# EAGLE board fjöl (EAGLE 9.5.2)
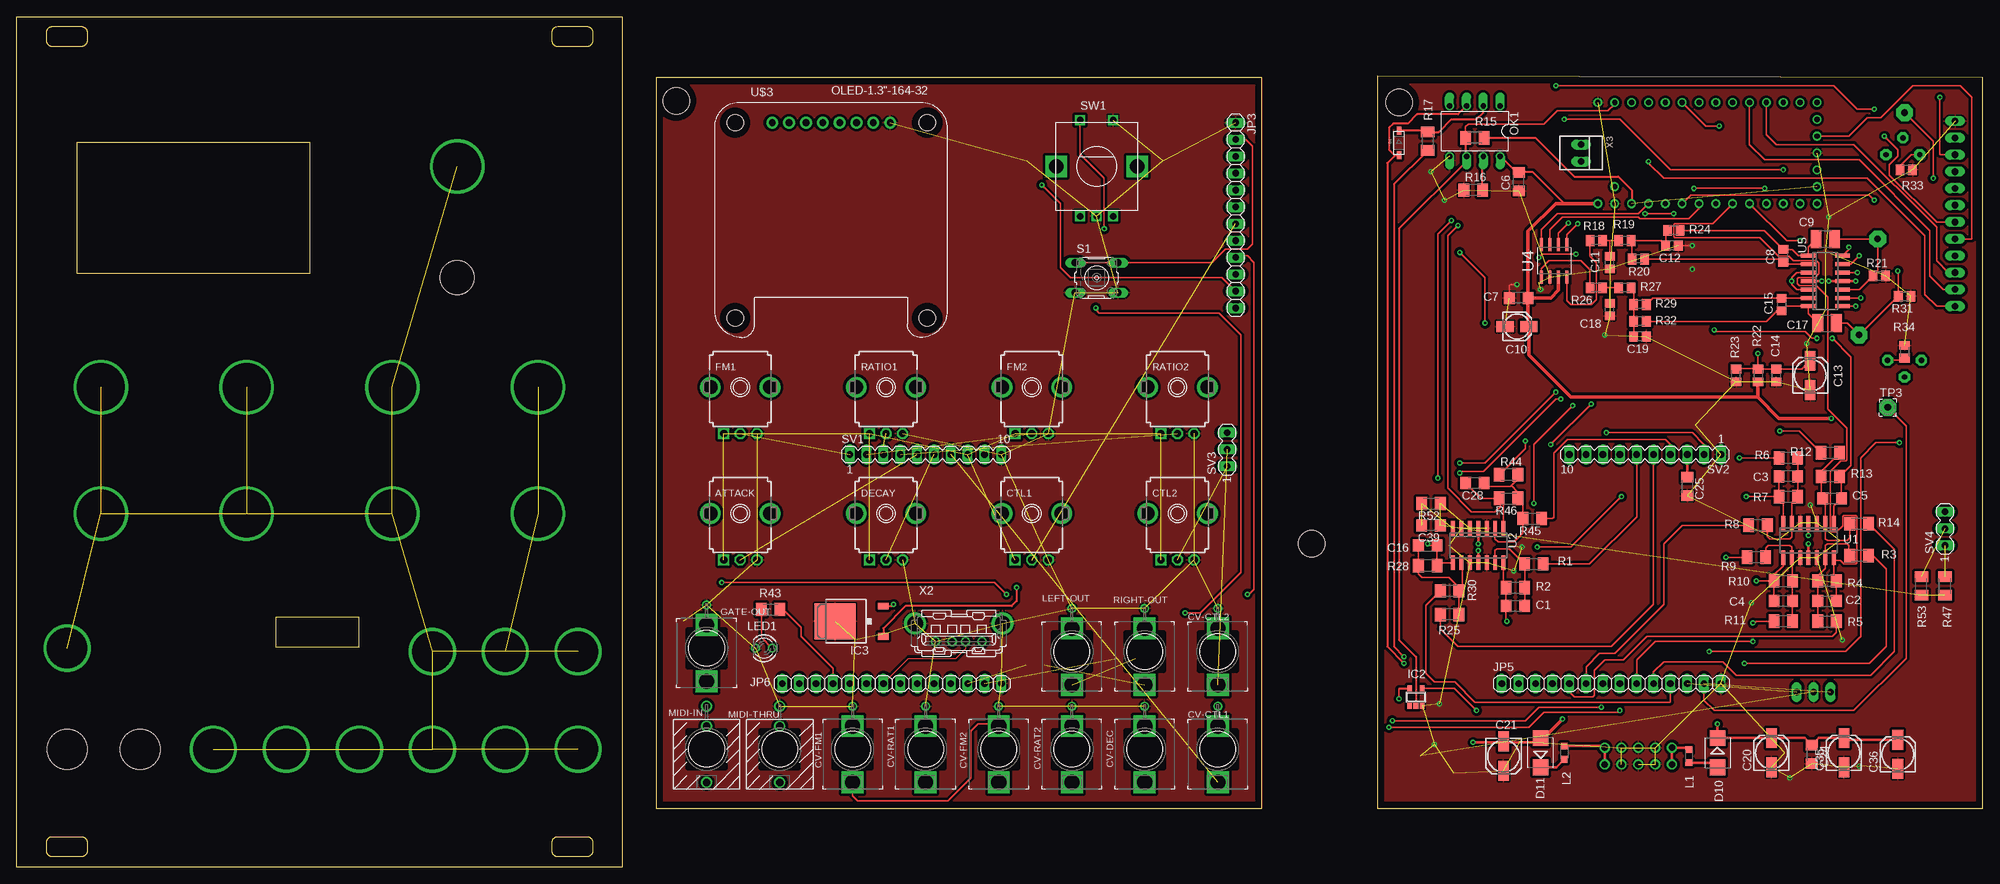
[diagram p0: board, top side]
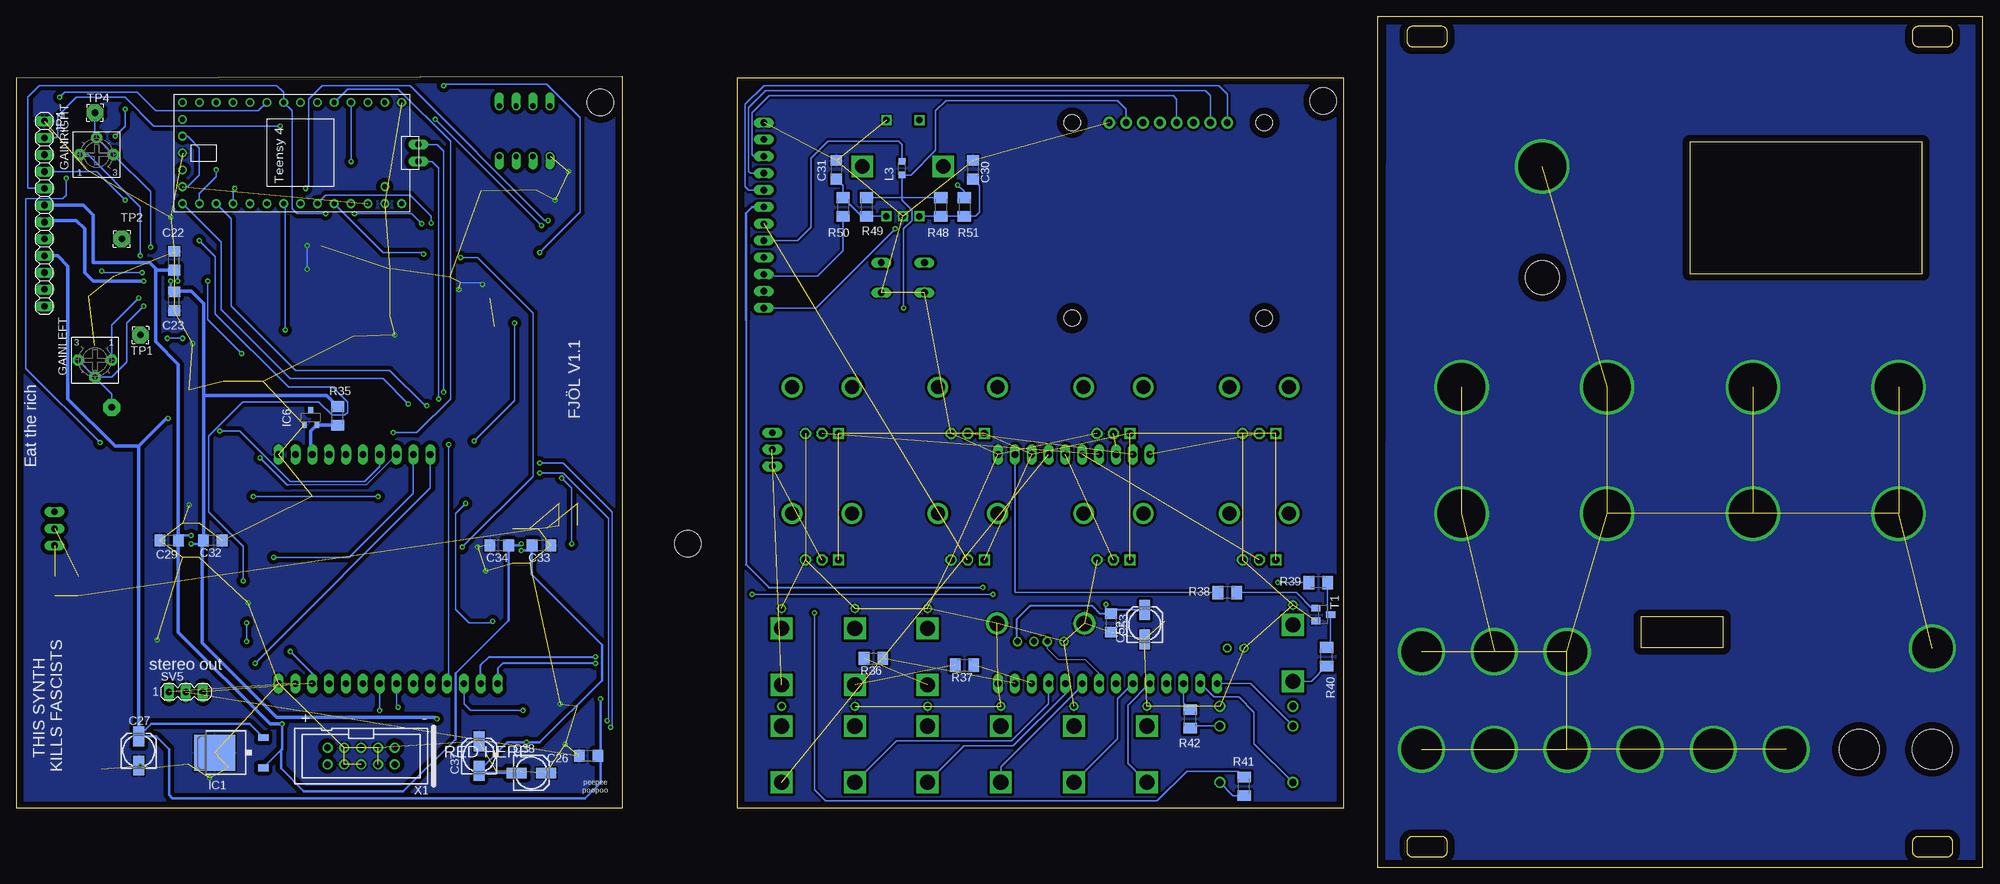
[diagram p1: board, bottom side, seen from below]

Size 296.42 x 128.27 mm. Coordinates in mm from the lower left corner, seen from the top.
Outline: 21.08,109.35 44.2,109.35 44.2,89.53 9.14,89.53 9.14,109.35 21.34,109.35
Outline: 96.39,8.89 187.71,8.89 187.71,119.05 96.39,119.05 96.39,8.89
Outline: 205.11,8.89 296.42,8.89 296.42,119.05 205.11,119.3 205.11,8.89
Outline: 91.31,0 0,0 0,128.27 91.31,128.27 91.31,0
Outline: 10.63,125.92 10.63,124.61 arc-90 9.76,123.74 5.4,123.74 arc-90 4.53,124.61 4.53,125.92 arc-90 5.4,126.79 9.76,126.79 arc-90 10.63,125.92
Outline: 86.83,125.92 86.83,124.61 arc-90 85.96,123.74 81.6,123.74 arc-90 80.73,124.61 80.73,125.92 arc-90 81.6,126.79 85.96,126.79 arc-90 86.83,125.92
Outline: 10.63,3.75 10.63,2.44 arc-90 9.76,1.57 5.4,1.57 arc-90 4.53,2.44 4.53,3.75 arc-90 5.4,4.62 9.76,4.62 arc-90 10.63,3.75
Outline: 86.83,3.75 86.83,2.44 arc-90 85.96,1.57 81.6,1.57 arc-90 80.73,2.44 80.73,3.75 arc-90 81.6,4.62 85.96,4.62 arc-90 86.83,3.75
Outline: 39.12,37.72 51.56,37.72 51.56,33.15 39.12,33.15 39.12,37.72
Copper layers (1*16): Top 0.035mm / dielectric 1.5mm / Bottom 0.035mm
Design rules "default": minimum track width 6mil, minimum drill 0.35mm, track to track 6mil, track to pad 6mil, pad to pad 6mil, via to via 6mil, smd to smd 6mil, copper to edge 40mil, drill to drill 6mil, minimum pad ring 10mil, minimum via ring 8mil, stop-mask expansion 4mil, vias tented up to drill 0mil, thermal gap 10mil
Holes 4.01 mm at 99.44,115.57 208.41,115.32 195.2,48.77
Holes 6.1 mm at 18.64,17.78 7.62,17.78
Holes 5.2 mm at 66.42,88.9

## Footprints (pad centres in the part's own frame; a part is rotated, then mirrored left to right if it is on the bottom)
9MM_SNAP-IN_POT = drill 1.1 square: 1 -2.5,-7 | drill 1.1 octagon: 2 0,-7; 3 2.5,-7 | drill 2.1 pad 2.794: CHASSIS1 -4.5,0; CHASSIS2 4.5,0
C1206 = smd 1.6 x 1.8: 1 -1.4,0; 2 1.4,0
C0805 = smd 1.3 x 1.5: 1 -0.95,0; 2 0.95,0
C1210 = smd 1.6 x 2.7: 1 -1.4,0; 2 1.4,0
153CLV-0405 = smd 2.6 x 1.6: + 1.8,0; - -1.8,0
153CLV-0505 = smd 3 x 1.6: + 2.2,0; - -2.2,0
WQP-PJ301M-12_JACK = drill 2.286 pad 2.413 square: P$1_TIP 0,5; P$2_SWITCH 0,-3.5 | drill 0.85: P$3_SLEEVE 0,-6.5
SOD-123 = smd 1.2 x 0.7: A 1.85,0; C -1.85,0
SMB = smd 2.4 x 2.4: A 2.2,0; C -2.2,0
BOURNS_3362P_TRIMMER = drill 0.813 pad 1.676 octagon: 1 -2.54,0; 2 0,2.54; 3 2.54,0
TO252 = smd 1 x 1.6: 1 -2.28,-4.8; 2 2.28,-4.8 | smd 5.4 x 6.2: 3 0,2.5
SOT23-5 = smd 0.69 x 0.99: 1 -0.95,-1.29; 2 0,-1.29; 3 0.95,-1.29; 4 0.95,1.3; 5 -0.95,1.3
DBZ_R-PDSO-G3 = smd 0.7 x 1: 1 -0.95,-1.1; 2 0.95,-1.1; 3 0,1.1
1X12 = drill 1.016 long: 1 -13.97,0; 2 -11.43,0; 3 -8.89,0; 4 -6.35,0; 5 -3.81,0; 6 -1.27,0; 7 1.27,0; 8 3.81,0; 9 6.35,0; 10 8.89,0; 11 11.43,0; 12 13.97,0
1X14 = drill 1.016 long: 1 -16.51,0; 2 -13.97,0; 3 -11.43,0; 4 -8.89,0; 5 -6.35,0; 6 -3.81,0; 7 -1.27,0; 8 1.27,0; 9 3.81,0; 10 6.35,0; 11 8.89,0; 12 11.43,0; 13 13.97,0; 14 16.51,0
L2012C = smd 1 x 1: 1 -1,0; 2 1,0
LED3MM = drill 0.813 octagon: A -1.27,0; K 1.27,0
WQP-PJ366ST_JACK = drill 1.1: P$1_TIP 0,5; P$2_SWITCH 0,-3.5; P$3_SLEEVE 0,-6.5
DIL08 = drill 0.813 offset: 1 -3.81,-3.81; 2 -1.27,-3.81; 3 1.27,-3.81; 4 3.81,-3.81; 5 3.81,3.81; 6 1.27,3.81; 7 -1.27,3.81; 8 -3.81,3.81
M1206 = smd 1.6 x 2: 1 -1.4,0; 2 1.4,0
M0805 = smd 1.3 x 1.6: 1 -0.95,0; 2 0.95,0
B3F-10XX = drill 1.016 long: 1 -3.251,2.261; 2 3.251,2.261; 3 -3.251,-2.261; 4 3.251,-2.261
MA10-1 = drill 1.016 long: 1 -11.43,0; 2 -8.89,0; 3 -6.35,0; 4 -3.81,0; 5 -1.27,0; 6 1.27,0; 7 3.81,0; 8 6.35,0; 9 8.89,0; 10 11.43,0
MA03-1 = drill 1.016 long: 1 -2.54,0; 2 0,0; 3 2.54,0
ALPS_EC12E_SW = drill 1 square: A -2.5,-7.5; B 2.5,-7.5; C 0,-7.5; D -2.5,7; E 2.5,7 | drill 2.2 square: GND1 -6.1,0; GND2 6.1,0
SOT23 = smd 1 x 1.4: 1 -0.95,-1.1; 2 0.95,-1.1; 3 0,1.1
2,54/1,0 = drill 1.016 pad 2.54 octagon: 1 0,0
SO14 = smd 0.6 x 2.2: 1 -3.81,-2.6; 2 -2.54,-2.6; 3 -1.27,-2.6; 4 0,-2.6; 5 1.27,-2.6; 6 2.54,-2.6; 7 3.81,-2.6; 8 3.81,2.6; 9 2.54,2.6; 10 1.27,2.6; 11 0,2.6; 12 -1.27,2.6; 13 -2.54,2.6; 14 -3.81,2.6
SOIC127P600X175-8N = smd 1.97 x 0.6: 1 -2.475,1.905; 2 -2.475,0.635; 3 -2.475,-0.635; 4 -2.475,-1.905; 5 2.475,-1.905; 6 2.475,-0.635; 7 2.475,0.635; 8 2.475,1.905
TEENSY4.0 = drill 0.8: 3.3V@1 7.62,10.16; 3.3V@2 -2.54,-17.78; AGND 7.62,12.7; D0 -7.62,12.7; D1 -7.62,10.16; D2 -7.62,7.62; D3 -7.62,5.08; D4 -7.62,2.54; D5 -7.62,0; D6 -7.62,-2.54; D7 -7.62,-5.08; D8 -7.62,-7.62; D9 -7.62,-10.16; D10 -7.62,-12.7; D11 -7.62,-15.24; D12 -7.62,-17.78; D13/LED 7.62,-17.78; D14/A0 7.62,-15.24; D15/A1 7.62,-12.7; D16/A2 7.62,-10.16; D17/A3 7.62,-7.62; D18/A4 7.62,-5.08; D19/A5 7.62,-2.54; D20/A6 7.62,0; D21/A7 7.62,2.54; D22/A8 7.62,5.08; D23/A9 7.62,7.62; GND@1 -7.62,15.24; GND@2 0,-17.78; ON/OFF 5.08,-17.78; PROGRAM 2.54,-17.78; VBAT -5.08,-17.78; VIN 7.62,15.24; VUSB 5.08,12.7
OLED-1.3"-164-32 = drill 1.016 pad 1.778: 3.3V 21.336,32.512; CLK 11.176,32.512; CS 18.796,32.512; D/C 13.716,32.512; DATA 8.636,32.512; GND 26.416,32.512; RST 16.256,32.512; VIN 23.876,32.512 | hole 2.5: 3.048,3.048; 32.004,3.048; 3.048,32.512; 32.004,32.512
PAK100/2500-10 = drill 1 pad 1.422: 1 -5.08,-1.27; 2 -5.08,1.27; 3 -2.54,-1.27; 4 -2.54,1.27; 5 0,-1.27; 6 0,1.27; 7 2.54,-1.27; 8 2.54,1.27; 9 5.08,-1.27; 10 5.08,1.27
KUSBVX = drill 0.9 pad 1.3: 1 3.5,0; 2 1,0; 3 -1,0; 4 -3.5,0 | drill 2.3 pad 2.8: M1 -6.57,2.71; M2 6.57,2.71
22-23-2021 = drill 1 long: 1 -1.27,0; 2 1.27,0

## Placement (x,y rotation side)
ATTACK  50k-lin  [9MM_SNAP-IN_POT]  109.09,53.34 0 top
C1  1n  [C1206]  225.93,39.37 180 top
C2  1n  [C1206]  272.92,40.13 0 top
C3  1n  [C1206]  267.08,58.93 180 top
C4  1n  [C1206]  266.32,40.13 180 top
C5  1n  [C1206]  273.69,55.63 0 top
C6  100n  [C1206]  226.44,103.38 90 top
C7  100n  [C1206]  226.44,85.85 180 top
C8  270p  [C0805]  266.32,92.2 90 top
C9  10u  [C1210]  272.67,94.74 0 top
C10  3.3µ  [153CLV-0405]  226.19,81.53 0 top
C11  2.7n  [C0805]  240.16,91.19 90 top
C12  2.7n  [C0805]  249.56,93.73 180 top
C13  10u  [153CLV-0505]  270.38,74.17 90 top
C14  100n  [C0805]  265.3,74.17 90 top
C15  270p  [C0805]  266.06,84.84 270 top
C16  1n  [C1206]  212.72,48.51 0 top
C17  10u  [C1210]  272.92,82.04 0 top
C18  2.7n  [C0805]  240.16,84.07 90 top
C19  2.7n  [C0805]  244.73,80.01 180 top
C20  100µ  [153CLV-0505]  264.54,17.27 90 top
C21  100µ  [153CLV-0505]  224.16,16.76 270 top
C22  100n  [C1206]  272.67,91.44 90 bottom
C23  100n  [C1206]  272.67,85.34 90 bottom
C24  100n  [C1206]  270.64,17.02 270 top
C25  100n  [C1206]  251.84,57.4 270 top
C26  100n  [C1206]  210.19,16.76 180 bottom
C27  100µ  [153CLV-0505]  278,17.53 90 bottom
C28  1n  [C1206]  219.84,57.91 180 top
C29  100n  [C1206]  273.43,49.28 180 bottom
C30  10n  [C1206]  152.27,105.16 270 bottom
C31  10n  [C1206]  172.85,105.16 270 bottom
C32  100n  [C1206]  266.83,49.28 180 bottom
C33  100n  [C1206]  217.3,48.51 180 bottom
C34  100n  [C1206]  223.65,48.51 180 bottom
C35  100µ  [153CLV-0505]  275.46,17.27 90 top
C36  100µ  [153CLV-0505]  283.59,17.02 90 top
C37  100µ  [153CLV-0505]  226.69,16.76 90 bottom
C38  100µ  [153CLV-0505]  218.82,14.22 0 bottom
C39  1n  [C1206]  213.23,51.56 180 top
C52  100µ  [153CLV-0505]  126.37,36.58 90 bottom
C53  100n  [C1206]  131.44,36.83 270 bottom
CTL1  [9MM_SNAP-IN_POT]  153.03,53.34 0 top
CTL2  CTL2  [9MM_SNAP-IN_POT]  175.01,53.34 0 top
CV-CTL1  THONKICONNNEW  [WQP-PJ301M-12_JACK]  181.08,17.78 180 top
CV-CTL2  THONKICONNNEW  [WQP-PJ301M-12_JACK]  181.08,32.51 180 top
CV-DEC  THONKICONNNEW  [WQP-PJ301M-12_JACK]  170.05,17.78 180 top
CV-FM1  THONKICONNNEW  [WQP-PJ301M-12_JACK]  126.03,17.78 180 top
CV-FM2  THONKICONNNEW  [WQP-PJ301M-12_JACK]  148.06,17.78 180 top
CV-RAT1  THONKICONNNEW  [WQP-PJ301M-12_JACK]  137.03,17.78 180 top
CV-RAT2  THONKICONNNEW  [WQP-PJ301M-12_JACK]  159.08,17.78 180 top
D1  1n4148  [SOD-123]  208.41,109.22 270 top
D10  STPS1L30U  [SMB]  256.41,17.27 270 top
D11  STPS1L30U  [SMB]  229.74,17.27 90 top
DECAY  50k-lin  [9MM_SNAP-IN_POT]  131.06,53.34 0 top
FM1  50k-lin  [9MM_SNAP-IN_POT]  109.09,72.39 0 top
FM2  50k-lin  [9MM_SNAP-IN_POT]  153.03,72.39 0 top
GAINLEFT  10k  [BOURNS_3362P_TRIMMER]  284.61,76.45 180 bottom
GAINRIGHT  10k  [BOURNS_3362P_TRIMMER]  284.35,107.44 0 bottom
GATE-OUT  THONKICONNNEW  [WQP-PJ301M-12_JACK]  104.01,33.02 180 top
IC1  7805DT  [TO252]  264.03,17.27 90 bottom
IC2  74AUC1G17DBV  [SOT23-5]  210.95,25.65 0 top
IC3  7805DT  [TO252]  125.86,37.08 90 top
IC6  LM4040B10  [DBZ_R-PDSO-G3]  252.09,67.82 0 bottom
JP3  [1X12]  183.77,98.3 270 top
JP4  [1X12]  292.23,98.55 270 bottom
JP5  [1X14]  240.41,27.69 0 top
JP6  [1X14]  131.95,27.69 0 top
L1  BLM21PG221SN1D  [L2012C]  252.09,16.76 270 top
L2  BLM21PG221SN1D  [L2012C]  233.3,17.27 270 top
L3  BLM21PG221SN1D  [L2012C]  162.94,105.41 90 bottom
LED1  [LED3MM]  112.65,33.02 180 top
LEFT-OUT  THONKICONNNEW  [WQP-PJ301M-12_JACK]  159.08,32.51 180 top
MIDI-IN  THONKI-STEREO  [WQP-PJ366ST_JACK]  104.01,17.78 180 top
MIDI-THRU  THONKI-STEREO  [WQP-PJ366ST_JACK]  115.04,17.78 180 top
OK1  6N138  [DIL08]  219.84,111 180 top
R1  200k  [M1206]  228.73,45.72 180 top
R2  66.5k  [M1206]  225.93,42.16 180 top
R3  200k  [M1206]  277.75,46.99 180 top
R4  66.5k  [M1206]  272.92,43.18 0 top
R5  100k  [M1206]  272.92,37.08 180 top
R6  200k  [M1206]  267.08,61.72 0 top
R7  66.5k  [M1206]  267.08,55.88 180 top
R8  100k  [M1206]  262.51,51.56 0 top
R9  200k  [M1206]  262.25,46.74 0 top
R10  66.5k  [M1206]  266.32,43.18 180 top
R11  100k  [M1206]  266.32,37.08 0 top
R12  200k  [M1206]  273.43,62.48 0 top
R13  66.5k  [M1206]  273.43,58.93 0 top
R14  100k  [M1206]  277.75,51.82 180 top
R15  470  [M1206]  219.84,109.98 0 top
R16  1k  [M1206]  219.58,102.11 0 top
R17  470  [M1206]  212.72,109.47 270 top
R18  1.15k  [M0805]  238.12,94.49 0 top
R19  4.75k  [M0805]  242.44,94.49 0 top
R20  1.21k  [M0805]  244.47,91.69 0 top
R21  100k  [M0805]  280.8,89.15 180 top
R22  23.2k  [M0805]  262.51,74.17 90 top
R23  20k  [M0805]  259.21,74.17 270 top
R24  5.9k  [M0805]  249.81,96.01 0 top
R25  200k  [M1206]  216.03,38.1 0 top
R26  1.15k  [M0805]  238.12,87.38 0 top
R27  4.75k  [M0805]  242.44,87.38 0 top
R28  66.5k  [M1206]  212.72,45.47 0 top
R29  1.21k  [M0805]  244.73,84.84 0 top
R30  100k  [M1206]  216.03,41.66 0 top
R31  100k  [M0805]  284.61,86.11 180 top
R32  5.9k  [M0805]  244.73,82.3 0 top
R33  1k  [M0805]  284.86,105.16 0 top
R34  1k  [M0805]  284.61,77.72 90 top
R35  1k  [M1206]  248.03,68.07 270 bottom
R36  330  [M1206]  167.26,31.5 180 bottom
R37  330  [M1206]  153.54,30.48 180 bottom
R38  1k  [M1206]  113.92,41.4 0 bottom
R39  10k  [M1206]  100.2,42.93 0 bottom
R40  1k  [M1206]  98.93,31.75 270 bottom
R41  47  [M1206]  111.38,12.19 270 bottom
R42  47  [M1206]  119.51,22.35 270 bottom
R43  1k  [M1206]  113.66,38.86 180 top
R44  200k  [M1206]  224.92,59.18 0 top
R45  100k  [M1206]  228.47,52.58 180 top
R46  66.5k  [M1206]  224.92,55.63 180 top
R47  200k  [M1206]  290.7,42.42 270 top
R48  10k  [M1206]  157.1,99.57 90 bottom
R49  10k  [M1206]  168.28,99.57 90 bottom
R50  10k  [M1206]  171.83,99.57 90 bottom
R51  10k  [M1206]  153.54,99.57 90 bottom
R52  66.5k  [M1206]  213.23,54.86 180 top
R53  100k  [M1206]  287.15,42.42 270 top
RATIO1  50k-lin  [9MM_SNAP-IN_POT]  131.06,72.39 0 top
RATIO2  50k-lin  [9MM_SNAP-IN_POT]  175.01,72.39 0 top
RIGHT-OUT  THONKICONNNEW  [WQP-PJ301M-12_JACK]  170.05,32.51 180 top
S1  [B3F-10XX]  162.81,88.9 0 top
SV1  [MA10-1]  137.03,62.23 0 top
SV2  [MA10-1]  245.49,62.23 180 top
SV3  [MA03-1]  182.5,62.99 90 top
SV4  [MA03-1]  290.7,51.05 90 top
SV5  [MA03-1]  270.89,26.42 0 bottom
SW1  EC12E_SW  [ALPS_EC12E_SW]  162.81,105.66 0 top
T1  BC847  [SOT23]  99.44,38.1 270 bottom
TP1  [2,54/1,0]  277.75,80.26 0 bottom
TP2  [2,54/1,0]  280.54,94.74 0 bottom
TP3  [2,54/1,0]  282.07,69.34 0 top
TP4  [2,54/1,0]  284.61,113.79 0 bottom
U1  TL074  [SO14]  270.13,49.28 180 top
U2  TL074  [SO14]  220.34,48.51 180 top
U4  CS4334  [SOIC127P600X175-8N]  231.78,91.44 270 top
U5  MC33204  [SO14]  272.67,88.39 270 top
U$2  TEENSY4.0  [TEENSY4.0]  253.62,107.7 270 bottom
U$3  OLED-1.3"-164-32  [OLED-1.3"-164-32]  105.28,79.76 0 top
X1  2510-  [PAK100/2500-10]  244.47,16.76 180 bottom
X2  KUSBVX  [KUSBVX]  142.04,34.04 0 top
X3  22-23-2021  [22-23-2021]  235.84,107.7 270 top

## Library data of the parts
ATTACK CTL1 CTL2 CV-CTL1 CV-CTL2 CV-DEC CV-FM1 CV-FM2 CV-RAT1 CV-RAT2 DECAY FM1 FM2 GAINLEFT GAINRIGHT GATE-OUT LEFT-OUT MIDI-IN MIDI-THRU RATIO1 RATIO2 RIGHT-OUT U1 U2 U5 = MusicThingModular
C1-C7 C10 C16 C20-C39 C52 C53 L1-L3 R1-R17 R25 R28 R30 R33-R53 = resistor
C8 C9 C11-C15 C17-C19 = rcl; SPICEPREFIX: C
D1 JP3-JP6 = adafruit
D10 D11 = diode
IC1 IC3 = linear
IC2 = 74xx-little-us
IC6 = texas; MPN: LM4041B12IDBZR; OC_FARNELL: 1575212; OC_NEWARK: 58K5882
LED1 = led
OK1 = optocoupler; MF: VISHAY/TELEFUNKEN; MPN: 6N138; OC_FARNELL: 9860150; OC_NEWARK: 35K5294
R18-R24 R26 R27 R29 R31 R32 = rcl; SPICEPREFIX: R
S1 = switch-omron; MPN: B3F-1000; OC_FARNELL: 176432; OC_NEWARK: 36M3542
SV1-SV5 = con-lstb; OC_FARNELL: unknown; OC_NEWARK: unknown
SW1 = switch-alps; MPN: EC12E2424407; OC_FARNELL: 1520813; OC_NEWARK: 74M1068
T1 = transistor
TP1-TP4 = wirepad
U4 = SOIC127P600X175-8N
U$2 = Teensy4.0
U$3 = hallmar-lib
X1 = con-3m; MF: 3M; MPN: 2510-6002UB; OC_FARNELL: 9838244; OC_NEWARK: 46F4725
X2 = con-kycon
X3 = con-molex; MF: MOLEX; MPN: 22-23-2021; OC_FARNELL: 1462926; OC_NEWARK: 25C3832

## Nets
5V_USB: C52.+ C53.1 IC3.2 X2.1
+3.3V: JP4.8 R15.2 U$2.3.3V@1 U$2.3.3V@2 U$2.ON/OFF
+3.3V_F: JP3.8 L3.2
+3.3V_F1: L3.1 R41.1 R48.2 R49.2 U$3.VIN
+5V: C6.2 C7.1 C10.+ C26.1 C27.+ IC1.2 IC2.5 JP4.9 OK1.8 R22.1 U4.7 U$2.VIN
+5V-F: JP3.9 R39.1
+12V: C20.+ C22.1 C24.1 C29.1 C34.1 C35.+ C36.+ D10.C IC1.1 JP4.6 U1.4 U2.4 U5.4
+12V-F: IC3.1 JP3.6
-10V: C25.1 IC6.2 R35.2 SV2.3
-10V_F: ATTACK.1 CTL1.1 CTL2.1 DECAY.1 FM1.1 FM2.1 RATIO1.1 RATIO2.1 SV1.8
-12V: C21.- C23.2 C32.2 C33.2 C37.- C38.- D11.A R35.1 U1.11 U2.11 U5.11
ATT-POT: R1.1 SV2.6
ATT-POT-F: ATTACK.2 SV1.5
ATTACK: C1.2 R2.2 U2.14 U$2.D15/A1
B: R38.2 T1.1
CONTROL1: C28.2 R46.2 U2.1 U$2.D14/A0
CTL1-POT: JP4.7 R44.1
CTL1-POT-F: CTL1.2 JP3.7
CTL2: C39.2 R52.2 U2.7
CTL2-POT: R47.1 SV4.1
CTL2-POT-F: CTL2.2 SV3.1
CV-CTL1: R45.1 SV2.4
CV-CTL1-F: CV-CTL1.P$1_TIP SV1.7
CV-CTL2: R53.1 SV4.2
CV-CTL2-F: CV-CTL2.P$1_TIP SV3.2
CV-DEC: JP5.11 R30.1
CV-DEC-F: CV-DEC.P$1_TIP JP6.11
CV-FM1: JP5.5 R5.1
CV-FM1-F: CV-FM1.P$1_TIP CV-FM2.P$2_SWITCH JP6.5
CV-FM2: JP5.9 R11.1
CV-FM2-F: CV-FM2.P$1_TIP JP6.9
CV-RAT1: JP5.6 R8.1
CV-RAT1-F: CV-RAT1.P$1_TIP JP6.6
CV-RAT2: JP5.10 R14.1
CV-RAT2-F: CV-RAT2.P$1_TIP JP6.10
D+: JP5.7 X3.2
D+_F: JP6.7 X2.2
D-: JP5.8 X3.1
D-_F: JP6.8 X2.3
DEC-POT: R25.1 SV2.5
DEC-POT-F: DECAY.2 SV1.6
DECAY: C16.2 R28.2 U2.8 U$2.D16/A2
ENC-A: JP4.11 U$2.D8
ENC-A-F: JP3.11 R51.2
ENC-B: JP4.10 U$2.D9
ENC-B-F: JP3.10 R50.1
ENC-SW: JP4.12 U$2.D2
ENC-SW-F: JP3.12 SW1.D
FM1: C2.2 R4.2 U1.14 U$2.D18/A4
FM1-POT: R3.1 SV2.10
FM1-POT-F: FM1.2 SV1.1
FM2: C4.2 R10.2 U1.8 U$2.D17/A3
FM2-POT: R9.1 SV2.9
FM2-POT-F: FM2.2 SV1.2
GATE: SV2.2 U$2.D3
GATE-F: R38.1 SV1.9
GATE-LED: JP5.4 U$2.D13/LED
GATE-LED-F: JP6.4 R43.1
GND: ATTACK.3 C30.1 C31.1 C52.- C53.2 CTL1.3 CTL2.3 CV-CTL2.P$3_SLEEVE CV-DEC.P$3_SLEEVE CV-FM1.P$3_SLEEVE CV-FM2.P$3_SLEEVE CV-RAT1.P$3_SLEEVE CV-RAT2.P$3_SLEEVE DECAY.3 FM1.3 FM2.3 GATE-OUT.P$3_SLEEVE IC3.3 JP3.1 JP6.14 LED1.K LEFT-OUT.P$3_SLEEVE MIDI-THRU.P$3_SLEEVE RATIO1.3 RATIO2.3 RIGHT-OUT.P$3_SLEEVE S1.3 S1.4 SV1.10 SW1.C SW1.E T1.2 U$3.GND X2.4 X2.M1 X2.M2
GND1: C6.1 C7.2 C10.- C11.1 C12.1 C13.- C14.1 C18.1 C19.1 C20.- C21.+ C22.2 C23.1 C24.2 C25.2 C26.2 C27.- C29.2 C32.1 C33.1 C34.2 C35.- C36.- C37.+ C38.+ IC1.3 IC2.3 IC6.1 JP4.1 JP5.14 OK1.5 R16.1 R21.1 R23.2 R31.1 R33.2 R34.2 SV2.1 SV5.2 U1.3 U1.5 U1.10 U1.12 U2.3 U2.6 U2.10 U2.12 U4.6 U$2.AGND U$2.GND@1 U$2.GND@2 X1.3 X1.4 X1.5 X1.6 X1.7 X1.8
L_CH: R18.1 U4.8
LEFT: C9.2 R21.2 TP2.1 U5.10
LEFT-OUT: GAINLEFT.2 GAINLEFT.3 JP5.13 SV5.1 TP3.1 U5.8
LEFT-OUT-F: JP6.13 R36.1
LRCLK: U4.3 U$2.D20/A6
MCLK: U4.4 U$2.D23/A9
MIDI-IN-L-F: JP6.2 MIDI-IN.P$1_TIP
MIDI-IN-R-F: JP6.1 MIDI-IN.P$2_SWITCH
MIDI-RX: IC2.2 OK1.6 R15.1 U$2.D0
MIDI-RX4: JP5.2 R17.2
MIDI-RX5: D1.A JP5.1 OK1.3
MIDI-THRU-R-F: JP6.3 R42.1
MIDI-TX: IC2.4 JP5.3
N$1: D1.C OK1.2 R17.1
N$2: C1.1 R1.2 R2.1 U2.13
N$3: C11.2 R18.2 R19.1
N$4: C2.1 R3.2 R4.1 R5.2 U1.13
N$5: OK1.7 R16.2
N$6: C3.1 R6.2 R7.1 R8.2 U1.6
N$7: C12.2 R19.2 R20.1 R24.1
N$8: C13.+ C14.2 R22.2 R23.1 U5.3 U5.5
N$9: C8.2 C9.1 R24.2 U5.1
N$10: C4.1 R9.2 R10.1 R11.2 U1.9
N$11: C8.1 R20.2 U5.2
N$12: C5.1 R12.2 R13.1 R14.2 U1.2
N$13: GAINLEFT.1 R34.1 U5.9
N$14: C18.2 R26.2 R27.1
N$15: C19.2 R27.2 R29.1 R32.1
N$16: C15.1 R29.2 U5.6
N$17: C15.2 C17.1 R32.2 U5.7
N$18: GAINRIGHT.1 R33.1 U5.13
N$19: LEFT-OUT.P$1_TIP R36.2
N$20: R37.2 RIGHT-OUT.P$1_TIP
N$21: R39.2 R40.1 T1.3
N$22: GATE-OUT.P$1_TIP R40.2
N$23: C16.1 R25.2 R28.1 R30.2 U2.9
N$24: MIDI-THRU.P$1_TIP R41.2
N$25: MIDI-THRU.P$2_SWITCH R42.2
N$26: C39.1 R47.2 R52.1 R53.2 U2.5
N$27: LED1.A R43.2
N$28: C31.2 R49.1 R50.2 SW1.B
N$29: C30.2 R48.1 R51.1 SW1.A
N$30: C28.1 R44.2 R45.2 R46.1 U2.2
N$31: SV3.3
N$32: SV4.3
N$46: L1.1 X1.9 X1.10
N$47: L2.1 X1.1 X1.2
N$49: D10.A L1.2
N$50: D11.C L2.2
R_CH: R26.1 U4.5
RAT1-POT: R6.1 SV2.8
RAT1-POT-F: RATIO1.2 SV1.3
RAT2-POT: R12.1 SV2.7
RAT2-POT-F: RATIO2.2 SV1.4
RATIO1: C3.2 R7.2 U1.7 U$2.D22/A8
RATIO2: C5.2 R13.2 U1.1 U$2.D19/A5
RIGHT: C17.2 R31.2 TP1.1 U5.12
RIGHT-OUT: GAINRIGHT.2 GAINRIGHT.3 JP5.12 SV5.3 TP4.1 U5.14
RIGHT-OUT-F: JP6.12 R37.1
RST: JP4.3 U$2.D7
RST-F: JP3.3 U$3.RST
SCLK: JP4.4 U4.2 U$2.D21/A7
SCLK-F: JP3.4 U$3.CLK
SDATA: JP4.5 U4.1 U$2.D6
SDATA-F: JP3.5 U$3.DATA
SWITCH: JP4.2 U$2.D4
SWITCH-F: JP3.2 S1.1 S1.2

## Tracks (layer width: path | path; a pad name or v marks a point on that pad's centre or on a via)
5V_USB  (via drill 0.35)
  Top 0.152: v132.21,39.62 131.95,39.36
  Top 0.305: 131.95,39.36 IC3.2
  Bottom 0.152: 145.67,34.17 X2.1
  Bottom 0.305: C52.+ 130.9,38.78 C53.1 | C53.1 133.1,38.23 134.24,39.37 143.64,39.37 145.67,37.34 145.67,34.17 | C53.1 132.21,38.99 v132.21,39.62
+3.3V  (1 unrouted)
  Top 0.254: U$2.3.3V@2 276.23,110.24 279.02,113.03 281.05,113.03 285.88,117.86 292.99,117.86 294.77,116.08 294.77,94.74 JP4.8
  Top 0.305: R15.2 228.98,109.98 234.82,104.14 241.43,104.14 243.46,102.11 U$2.3.3V@1
  Bottom 0.254: U$2.ON/OFF 270.64,102.62 268.86,104.39 268.86,108.46 270.64,110.24 U$2.3.3V@2
+3.3V_F
  Bottom 0.203: L3.2 162.94,107.95 162.94,108.97 163.45,109.47 174.12,109.47 176.66,106.93 176.66,96.52 178.69,94.49 JP3.8
+3.3V_F1  (via drill 0.35)
  Top 0.203: v176.15,38.35 178.44,38.35 184.53,44.45 184.53,80.26 181.23,83.57 163.19,83.57 162.69,84.07 v162.69,84.33
  Bottom 0.203: 162.94,101.09 163.06,100.97 R49.2 | 162.94,101.09 162.94,104.39 | 162.94,104.39 L3.1 | 162.94,101.09 162.82,100.97 R48.2 | U$3.VIN 129.16,114.3 130.43,115.57 156.34,115.57 157.86,114.05 157.86,108.09 161.56,104.39 162.94,104.39 | R41.1 112.27,14.48 120.02,14.48 124.48,10.01 174.47,10.01 176.15,11.68 v176.15,38.35 | 162.94,101.09 162.94,100.58 161.42,99.06 161.42,97.54 162.69,96.27 v162.69,84.33
+5V  (via drill 0.35)
  Top 0.254: v208.41,25.4 208.41,26.92
  Top 0.305: OK1.8 226.06,104.78 C6.2 228.6,104.78 233.3,100.08 U$2.VIN | IC2.5 209.97,26.92 208.41,26.92
  Top 0.508: v273.56,67.69 265.68,67.69 262.51,70.87 | 262.51,70.87 R22.1 | 262.51,70.87 234.31,70.87 227.99,77.19 C10.+ 227.84,81.68 C7.1 | C7.1 231.27,85.85 232.41,87 U4.7 | C7.1 227.84,95.89 232.03,100.08 U$2.VIN
  Bottom 0.152: C26.1 208.41,16.76
  Bottom 0.406: IC1.2 261.27,21.59 276.14,21.59 C27.+ 275.38,19.73 273.43,17.78 273.43,10.92 272.92,10.41 210.69,10.41 208.41,12.7 208.41,16.76 v208.41,25.4
  Bottom 0.508: C27.+ 278,63.5 | 278,63.5 273.69,67.82 v273.56,67.69 | 278,63.5 281.56,63.5 288.67,70.61 288.67,90.68 290.19,92.2 JP4.9
+5V-F  (via drill 0.35)
  Top 0.203: v106.3,42.93 147.45,42.93 v149.22,41.15 | JP3.9 184.02,92.2 185.55,92.2 186.56,91.19 186.56,41.91 185.8,41.15 v185.55,41.15
  Bottom 0.203: R39.1 v106.3,42.93 | v149.22,41.15 v185.55,41.15
+12V  (via drill 0.35)
  Top 0.406: v256.41,21.59 D10.C C20.+ 269.58,19.47 C24.1 271.69,19.47 C35.+ 275.72,19.22 C36.+ | v220.34,48.77 U2.4 | v270.13,50.04 U1.4 | v272.16,88.39 U5.4
  Bottom 0.406: IC1.1 256.56,17.67 | 256.56,17.67 256.41,17.81 v256.41,21.59 | v220.34,48.77 220.6,48.51 C34.1 222.25,37.21 230.25,29.21 230.25,19.3 238.12,11.43 253.11,11.43 256.56,14.88 256.56,17.67 | C29.1 271.27,50.04 v270.13,50.04 | 275.33,90.04 275.46,90.17 275.46,90.29 | C22.1 272.16,89.53 v272.16,88.39
  Bottom 0.508: v256.41,21.59 258.19,21.59 272.03,35.43 C29.1 272.03,75.82 275.46,79.25 275.46,90.17 | 275.33,90.04 C22.1 | JP4.6 286.38,99.82 284.86,98.3 284.86,91.19 276.36,91.19 275.46,90.29
+12V-F  (via drill 0.35)
  Top 0.305: v150.75,42.16 150.75,40.13 149.99,39.37 133.99,39.37 130.66,36.04 IC3.1
  Bottom 0.305: 186.49,82.8 186.49,45.64 183.01,42.16 v150.75,42.16
  Bottom 0.406: JP3.6 185.55,99.57 186.49,98.63 186.49,82.8 186.49,82.47
-10V
  Top 0.406: C25.1 SV2.3
  Bottom 0.254: 251.1,66.67 IC6.2 | 252.09,62.48 SV2.3
  Bottom 0.508: R35.2 251.1,66.67 | IC6.2 252.09,65.77 252.09,62.48
-10V_F  (8 unrouted)
-12V  (via drill 0.35)
  Top 0.406: C21.- 223.89,18.82 | v220.34,47.75 U2.11 | v270.13,48.77 U1.11 | 223.89,18.82 229.09,18.82 D11.A 230.25,19.47 | v219.56,18.82 223.89,18.82 | v233.04,22.35 233.04,22.27 | v273.18,88.39 U5.11 v277.24,88.39
  Top 0.508: 233.04,22.27 230.25,19.47
  Bottom 0.406: v219.56,18.82 219.53,18.8 | 219.53,18.8 217.55,18.8 208.15,28.19 208.15,33.53 218.76,44.13 218.76,48.45 | C33.2 218.76,48.45 | 218.76,48.45 219.46,47.75 v220.34,47.75 | C32.2 268.42,49.09 268.74,48.77 v270.13,48.77 | 272.54,86.87 C23.2 273.18,87.25 v273.18,88.39 | 219.53,18.8 222.46,18.8 226.48,14.78 | 226.48,14.78 C37.- | C38.- 225.93,14.22 226.48,14.78
  Bottom 0.508: v233.04,22.35 233.3,22.61 257.18,22.61 268.42,33.85 268.42,49.09 | C32.2 268.23,71.12 | 268.23,71.12 268.23,84.97 270.13,86.87 272.54,86.87 | v277.24,88.39 284.86,88.39 286.13,89.66 286.13,96.27 287.4,97.54 291.97,97.54 | R35.1 249.68,71.12 268.23,71.12
ATT-POT
  Top 0.203: SV2.6 244.22,52.83 237.11,45.72 R1.1
ATT-POT-F  (1 unrouted)
  Bottom 0.203: 135.76,63.75 SV1.5
ATTACK  (via drill 0.35)
  Top 0.203: v234.57,69.6 228.73,63.75 v228.73,54.86 | v224.66,37.08 224.53,37.21 C1.2
  Top 0.254: C1.2 R2.2 224.16,42.54 U2.14
  Bottom 0.203: U$2.D15/A1 264.03,97.79 264.03,84.58 254.38,74.93 240.16,74.93 234.82,69.6 v234.57,69.6 | v228.73,54.86 230.25,53.34 230.25,38.86 228.22,36.83 224.92,36.83 v224.66,37.08
B
  Bottom 0.203: R38.2 103.5,41.4 101.15,39.05 T1.1
CONTROL1  (via drill 0.35)
  Top 0.2: 219.33,53.59 222.88,53.59 223.65,54.36 223.65,55.5 R46.2 | R46.2 224.16,54.99 U2.1 | C28.2 220.72,55.63 R46.2
  Top 0.203: v217.3,96.77 215.77,95.25 215.77,57.15 219.33,53.59 | v233.3,112.78 241.68,112.78 249.3,105.16 v266.32,105.16
  Bottom 0.203: v217.3,96.77 v233.3,112.78 | v266.32,105.16 266.32,104.14 268.86,101.6 U$2.D14/A0
CTL1-POT  (via drill 0.35)
  Top 0.2: R44.1 227.46,63.12 v227.46,64.26 | v221.36,82.04 221.36,88.9 v217.55,92.71 | v232.03,117.83 273.96,117.83 277.5,114.3 v280.03,114.3 | v281.56,110.24 283.59,108.2 283.59,107.19 282.32,105.92 282.32,104.39 289.43,97.28 JP4.7
  Bottom 0.2: v227.46,64.26 221.36,70.36 v221.36,82.04 | v217.55,92.71 211.45,98.81 211.45,113.03 216.53,118.11 231.78,118.11 232.03,117.86 v232.03,117.83 | v280.03,114.3 280.03,111.76 v281.56,110.24
CTL1-POT-F  (1 unrouted)
CTL2  (2 unrouted)
CTL2-POT  (1 unrouted)
CTL2-POT-F  (1 unrouted)
CV-CTL1
  Top 0.2: R45.1 231.52,52.58 231.78,52.83
  Top 0.203: SV2.4 249.3,63.75 248.54,64.52 233.81,64.52 231.78,62.48 231.78,52.83 231.78,52.7
CV-CTL1-F  (1 unrouted)
CV-CTL2  (1 unrouted)
CV-CTL2-F  (1 unrouted)
CV-DEC
  Top 0.254: R30.1 212.47,39.5 212.47,29.21 213.74,27.94 216.79,27.94 219.84,24.89 249.3,24.89 JP5.11 249.3,28.19
CV-DEC-F
  Bottom 0.203: CV-DEC.P$1_TIP 163.78,19.05 146.43,19.05 140.84,24.64 JP6.11
CV-FM1
  Top 0.203: JP5.5 234.06,26.42 234.82,25.65 237.62,25.65 237.87,25.91 237.87,29.72 239.4,31.24 242.19,31.24 245.75,34.8 273.69,34.8 274.32,35.44 R5.1
CV-FM1-F
  Top 0.203: CV-FM1.P$1_TIP 126.03,10.74 126.77,10.01 140.44,10.01 143.89,13.46 143.89,20.57 144.91,21.59 147.75,21.59 CV-FM2.P$2_SWITCH
  Bottom 0.203: CV-FM1.P$1_TIP 128.91,15.65 128.91,24.38 JP6.5
CV-FM2  (via drill 0.35)
  Top 0.203: JP5.9 244.22,31.24 247.02,34.04 v261.75,34.04 | v261.75,36.83 262,36.83 262.25,37.08 R11.1
  Bottom 0.203: v261.75,34.04 v261.75,36.83
CV-FM2-F
  Bottom 0.203: CV-FM2.P$1_TIP 148.06,15.14 135.76,27.43 JP6.9
CV-RAT1
  Top 0.254: R8.1 251.08,51.56 248.28,48.77 248.28,39.62 240.92,32.26 238.63,32.26 236.6,30.23 JP5.6
CV-RAT1-F
  Bottom 0.203: CV-RAT1.P$1_TIP 130.43,19.38 130.43,25.4 JP6.6
CV-RAT2
  Top 0.254: R14.1 283.08,47.88 283.08,32.51 279.53,28.96 259.21,28.96 257.18,30.99 248.28,30.99 246.76,29.46 JP5.10
CV-RAT2-F
  Bottom 0.203: CV-RAT2.P$1_TIP 153.57,18.29 146.18,18.29 138.3,26.16 JP6.10
D+  (via drill 0.35)
  Top 0.203: v232.79,70.61 232.03,70.61 221.11,59.69 217.81,59.69 v217.55,59.44 | v207.39,22.1 227.46,22.1 229.49,24.13 v238.89,24.13
  Bottom 0.203: X3.2 233.81,106.43 232.79,105.41 v232.79,70.61 | v217.55,59.44 214,59.44 207.14,52.58 207.14,22.35 v207.39,22.1 | v238.89,24.13 239.14,24.38 JP5.7
D+_F
  Top 0.152: JP6.7 134.49,31.5 141.61,31.5 143.13,33.02 143.13,33.94 X2.2
D-  (via drill 0.35)
  Top 0.203: v232.03,71.63 221.36,60.96 v217.55,60.96 | v241.68,23.62 241.43,23.37 230.25,23.37 227.97,21.08 v206.88,21.08
  Bottom 0.203: X3.1 233.04,108.97 232.03,107.95 v232.03,71.63 | v217.55,60.96 214,60.96 206.63,53.59 206.63,21.34 v206.88,21.08 | v241.68,23.62 JP5.8
D-_F
  Bottom 0.152: JP6.8 133.22,29.21 135.25,31.24 139.32,31.24 141.04,32.96 X2.3
DEC-POT
  Top 0.254: R25.1 214.63,35.94 217.3,33.27 240.41,33.27 246.76,39.62 SV2.5
DEC-POT-F  (1 unrouted)
DECAY  (via drill 0.35)
  Top 0.203: v252.86,102.36 v263.52,102.36 | C16.2 212.98,48.51 v212.72,48.77 | v214.25,58.67 214.25,95.5 v216.28,97.54
  Top 0.254: U2.8 214.57,45.91 R28.2 C16.2
  Bottom 0.203: v216.28,97.54 216.79,97.54 237.11,117.86 250.32,117.86 252.35,115.82 252.35,102.87 v252.86,102.36 | v263.52,102.36 263.78,102.11 U$2.D16/A2 | v214.25,58.67 212.72,57.15 v212.72,48.77
ENC-A
  Top 0.254: JP4.11 290.45,87.12 288.42,89.15 288.42,96.01 277.75,106.68 263.52,106.68 261.24,108.97 U$2.D8
ENC-A-F  (via drill 0.35)
  Top 0.203: v154.56,102.87 157.35,100.08 157.35,90.42 158.88,88.9 181.74,88.9 JP3.11
  Bottom 0.203: R51.2 153.54,101.85 v154.56,102.87
ENC-B
  Top 0.254: JP4.10 291.21,89.66 289.43,91.44 289.43,96.52 276.99,108.97 265.3,108.97 263.78,110.49 U$2.D9
ENC-B-F
  Bottom 0.203: R50.1 171.83,92.96 175.64,89.15 183.51,89.15 JP3.10
ENC-SW  (via drill 0.35)
  Top 0.254: JP4.12 289.43,84.58 287.65,86.36 287.65,95.25 279.02,103.89 248.28,103.89 246,106.17 v246,106.43
  Bottom 0.254: v246,106.43 U$2.D2
ENC-SW-F  (via drill 0.35)
  Top 0.203: v163.96,96.27 163.96,103.89 160.31,107.53 SW1.D
  Bottom 0.203: JP3.12 175.89,84.33 v163.96,96.27
FM1
  Top 0.203: U$2.D18/A4 255.69,97.07 250,97.07 249.85,96.92 249.85,95.11 250,94.96 262.75,94.96 265.56,92.16 267.17,92.16 267.84,91.49 271.27,91.49 271.68,91.08 271.68,89.51 271.11,88.95 268.61,88.95 268.46,88.8 268.46,87.99 268.77,87.68 271.27,87.68 273.01,85.94 273.01,69.13 275.88,66.26 275.88,61.38 275.74,61.23 274.97,61.23 273.38,59.64 273.38,50.67 273.53,50.52 274.34,50.52 275.29,51.47 275.29,52.92 275.44,53.07 277.25,53.07 277.4,52.92 277.4,45.88 277.25,45.74 275.44,45.74 274.95,46.23 273.94,46.23
  Top 0.254: U1.14 273.94,46.23 273.94,43.56 R4.2 C2.2
FM1-POT  (via drill 0.35)
  Top 0.254: v260.48,30.73 279.27,30.73 281.81,33.27 281.81,44.96 279.78,46.99 R3.1
  Bottom 0.254: SV2.10 234.06,57.15 v260.48,30.73
FM1-POT-F  (1 unrouted)
FM2  (via drill 0.35)
  Top 0.203: v262.25,43.18 264.66,43.18 264.92,42.93 | U$2.D17/A3 266.83,94.49 v268.86,94.49 v268.87,94.48
  Top 0.254: U1.8 266.32,45.47 264.92,44.07 R10.2 264.92,42.93 C4.2 | C4.2 264.92,40 264.54,39.62 264.54,39.75 C4.2
  Bottom 0.203: v268.87,94.48 266.45,92.06 266.45,83.41 255.43,72.39 248.79,72.39 246.52,70.12 246.52,68.57 246.93,68.16 248.88,68.16 250.9,70.18 262.31,70.18 267.46,65.03 267.46,53.59 262.25,48.38 v262.25,43.18
FM2-POT  (via drill 0.35)
  Top 0.254: v257.68,46.74 R9.1
  Bottom 0.254: SV2.9 236.6,56.39 246.25,46.74 v257.68,46.74
FM2-POT-F  (1 unrouted)
  Bottom 0.203: SV1.2 128.14,60.71
GATE  (via drill 0.35)
  Top 0.254: v239.65,65.53 252.6,65.53 254.38,63.75 SV2.2
  Bottom 0.254: U$2.D3 246.51,117.35 238.89,117.35 231.01,109.47 231.01,70.61 236.09,65.53 v239.65,65.53
GATE-F
  Bottom 0.203: SV1.9 145.92,41.4 R38.1
GATE-LED  (via drill 0.35)
  Top 0.203: 231.39,63.88 v231.27,63.75
  Top 0.254: v237.36,69.85 231.39,63.88
  Bottom 0.203: v231.27,63.75 231.27,27.94 JP5.4
  Bottom 0.254: U$2.D13/LED 265.56,94.23 265.56,84.07 255.14,73.66 241.17,73.66 v237.36,69.85
GATE-LED-F
  Top 0.203: R43.1 115.57,38.86 118.24,36.2 118.24,34.8 123.06,29.97 JP6.4
GND  (35 unrouted)
  pour Top (isolate 0.406): 96.9,118.11 97.66,118.87 186.06,118.87 187.32,117.6 187.32,10.67 186.06,9.4 98.17,9.4 96.9,10.67
  pour Bottom (isolate 0.406): 187.07,117.86 186.31,118.62 97.92,118.62 96.65,117.35 96.65,10.41 97.92,9.14 185.8,9.14 187.07,10.41
GND1  (via drill 0.35)  (71 unrouted)
  Top 0.203: C12.1 v252.6,93.73 | C7.2 225.04,87.75 225.17,87.88 v226.19,87.88
  Bottom 0.203: v252.6,93.73 v252.6,90.17 | v226.19,87.88 226.44,88.14 229.49,88.14
  other vias: 229.74,87.12 273.18,98.04 269.88,78.99 270.38,54.61 261.49,39.88 275.21,34.29 277.75,15.24 267.34,13.46 239.4,80.26 225.68,44.7 226.95,48.26 213.74,18.54 214.5,24.64 213.23,104.9 215.26,100.58
  pour Bottom (isolate 0.61): 206.12,118.62 213.49,118.62 296.54,118.62 297.56,117.6 297.56,10.67 296.29,9.4 206.88,9.4 205.36,10.92 205.36,117.86
  pour Top (isolate 0.406): 206.12,118.62 296.54,118.62 297.56,117.6 297.56,10.67 296.29,9.4 206.88,9.4 205.36,10.92 205.36,117.86
GND3  (via drill 6.1, 7.2)  (18 unrouted)
  other vias: 12.7,72.39 34.67,72.39 56.64,72.39 78.61,72.39 56.64,53.34 34.67,53.34 12.7,53.34 7.62,33.02 66.42,105.66 29.64,17.78 40.64,17.78 51.66,17.78 62.69,17.78 73.66,17.78 84.63,17.78 73.66,32.51 62.69,32.51 78.61,53.34 84.63,32.51
  pour Bottom (isolate 0.813): 0.73,127.16 89.89,127.16 90.14,0.93 0.98,0.93
L_CH
  Top 0.254: U4.8 233.68,85.47 234.31,84.84 237.36,84.84 238.12,85.6 238.12,91.19 237.18,92.14 R18.1
LEFT
  Top 0.254: C9.2 TP2.1 280.54,89.92 279.78,89.15 | R21.2 279.78,89.15 | 279.78,89.15 277.75,87.12 U5.10
LEFT-OUT  (via drill 0.35)  (1 unrouted)
  Top 0.203: TP3.1 284.86,66.55 284.86,31.5 276.99,23.62 255.91,23.62 254.38,25.15 JP5.13
  Top 0.254: v277.24,84.58 U5.8
  Bottom 0.254: GAINLEFT.2 282.07,73.91 279.78,76.2 279.78,82.04 v277.24,84.58 | GAINLEFT.2 GAINLEFT.3 | GAINLEFT.2 282.07,71.37 TP3.1
LEFT-OUT-F  (1 unrouted)
LRCLK
  Top 0.254: U4.3 231.14,96.14 233.04,98.04 244.47,98.04 244.73,97.79 252.09,97.79 253.62,99.31 U$2.D20/A6
MCLK
  Top 0.254: U4.4 229.87,96.14 232.28,98.55 244.47,98.55 U$2.D23/A9
MIDI-IN-L-F
  Bottom 0.203: MIDI-IN.P$1_TIP 109.86,18.62 109.86,23.37 112.14,25.65 115.95,25.65 JP6.2
MIDI-IN-R-F
  Bottom 0.203: MIDI-IN.P$2_SWITCH 110.42,27.69 JP6.1
MIDI-RX
  Top 0.254: R15.1 218.44,111.63 218.82,112.01 230.25,112.01 232.28,114.05 239.9,114.05 240.92,115.06 U$2.D0
  Top 0.305: R15.1 218.44,106.81 218.57,106.68 OK1.6 218.57,106.43 208.41,96.27 208.41,34.29 210.95,31.75 IC2.2
MIDI-RX4  (via drill 0.35)
  Top 0.305: R17.2 207.64,102.99 207.64,33.27 v209.17,31.75
  Bottom 0.305: JP5.2 226.44,30.48 225.17,31.75 v209.17,31.75
MIDI-RX5  (via drill 0.35)
  Top 0.305: OK1.3 217.3,113.54 211.12,113.54 209.72,112.14 207.52,112.14 206.88,111.51 206.88,108.2 207.72,107.37 D1.A 207.83,107.37 206.63,106.17 206.63,33.27 v209.17,30.73
  Bottom 0.305: v209.17,30.73 223.14,30.73 223.9,29.97 JP5.1
MIDI-THRU-R-F
  Bottom 0.203: R42.1 120.52,24.77 JP6.3
MIDI-TX  (via drill 0.35)
  Top 0.254: IC2.4 216.76,26.95 v220.09,23.62
  Bottom 0.254: v220.09,23.62 227.97,23.62 228.98,24.64 JP5.3
N$1
  Top 0.305: D1.C 212.53,111.07 R17.1 214.38,110.87 216.28,112.78 220.09,112.78 221.11,113.79 OK1.2
N$2
  Top 0.254: U2.13 222.88,47.75 223.14,48.01 225.04,48.01 R1.2 R2.1 C1.1
N$3
  Top 0.254: C11.2 240.16,94.49 | 240.16,94.49 239.9,94.49 R18.2 | 240.16,94.49 R19.1
N$4
  Top 0.254: R5.2 C2.1 R4.1 271.52,43.94 272.67,45.09 U1.13 272.67,48.51 272.92,48.77 275.97,48.77 276.23,48.51 276.23,47.11 R3.2
N$5
  Top 0.305: R16.2 220.98,107.06 OK1.7
N$6
  Top 0.254: R6.2 C3.1 R7.1 267.59,54.99 U1.6 267.59,49.78 267.34,49.53 264.29,49.53 263.91,49.91 R8.2
N$7
  Top 0.254: R20.1 243.53,94.36 R19.2 247.84,94.49 C12.2 248.6,95.76 R24.1
N$8  (via drill 0.35)
  Top 0.254: U5.3 268.35,89.66 267.59,88.9 v267.59,88.39 267.59,87.88 268.35,87.12 U5.5 | v262.51,77.47 262.51,75.18 | 262.51,75.18 R22.2 C14.2 269.13,75.12 C13.+ | R23.1 259.27,75.18 262.51,75.18
  Bottom 0.254: v267.59,88.39 267.59,82.55 v262.51,77.47
N$9
  Top 0.254: R24.2 263.46,96.01 C8.2 267.65,93.15 268.61,92.2 U5.1 270.07,93.54 C9.1
N$10
  Top 0.254: R11.2 C4.1 R10.1 267.72,46.1 267.59,46.23 U1.9 267.59,48.26 267.34,48.51 264.03,48.51 263.65,48.14 R9.2
N$11
  Top 0.254: R20.2 265.88,91.69 C8.1 266.64,90.93 U5.2
N$12
  Top 0.254: R12.2 272.03,59.68 R13.1 272.03,55.88 C5.1 272.67,55.24 U1.2 272.67,49.53 272.92,49.28 275.97,49.28 276.35,49.65 R14.2
N$13  (via drill 0.35)
  Top 0.254: GAINLEFT.1 284.29,76.45 R34.1 | v278,85.85 U5.9
  Bottom 0.254: GAINLEFT.1 282.07,81.79 v278,85.85
N$14
  Top 0.254: R26.2 240.16,87.38 | 240.16,87.38 R27.1 | C18.2 240.16,87.38
N$15
  Top 0.254: R27.2 243.78,86.99 R29.1 R32.1 C19.2
N$16
  Top 0.203: C15.1 270,85.79 U5.6
  Top 0.254: R29.2 246.63,85.79 C15.1
N$17
  Top 0.254: R32.2 263.78,82.3 265.37,83.89 C15.2 266.76,84.58 U5.7 270.07,83.5 C17.1
N$18  (via drill 0.35)
  Top 0.254: U5.13 276.48,90.93 v277.75,92.2 | R33.1 283.91,105.73 285.62,107.44 GAINRIGHT.1
  Bottom 0.254: v277.75,92.2 277.75,99.57 285.62,107.44 GAINRIGHT.1
N$19  (1 unrouted)
N$20  (1 unrouted)
N$21
  Bottom 0.203: R39.2 98.8,38.56 98.38,38.14 | 98.38,38.14 T1.3 | R40.1 98.38,33.7 98.38,38.14
N$22
  Bottom 0.203: R40.2 101.26,28.02 GATE-OUT.P$1_TIP
N$23
  Top 0.254: C16.1 R28.1 211.32,44.2 211.83,43.69 215.9,43.69 217.43,42.16 | R25.2 R30.2 217.43,42.16 | U2.9 217.94,45.78 217.94,41.66 217.43,42.16
N$24
  Bottom 0.203: MIDI-THRU.P$1_TIP 113.05,10.79 R41.2
N$25
  Bottom 0.203: MIDI-THRU.P$2_SWITCH 119.18,21.28 R42.2
N$26  (4 unrouted)
N$27
  Top 0.203: LED1.A 112.27,34.67 R43.2
N$28
  Bottom 0.203: SW1.B R49.1 169.03,98.17 R50.2 171.83,102.74 C31.2
N$29
  Bottom 0.203: C30.2 151.26,102.74 151.26,98.81 151.9,98.17 R51.1 R48.1 SW1.A
N$30
  Top 0.2: C28.1 221.75,57.4 225.17,57.4 225.3,57.53 | R44.2 226.32,58.55 225.3,57.53 | 225.3,57.53 226.32,56.51 R46.1 227.07,54.87 R45.2 227.07,50.42 225.68,49.02 223.39,49.02 222.88,49.53 U2.2
N$46
  Top 0.406: X1.10 X1.9 251.82,18.03 L1.1
N$47
  Top 0.406: X1.1 239.4,17.53 | 239.4,17.53 X1.2 | L2.1 238.65,18.27 239.4,17.53
N$49
  Top 0.406: L1.2 255.72,15.76 D10.A
N$50
  Top 0.406: L2.2 232.1,15.07 D11.C
R_CH
  Top 0.254: U4.5 229.87,90.3 231.01,91.44 235.84,91.44 237.18,90.1 R26.1
RAT1-POT  (via drill 0.35)
  Top 0.203: v259.72,61.72 R6.1
  Bottom 0.152: SV2.8 243.71,57.66 255.4,57.66
  Bottom 0.203: 255.4,57.66 255.65,57.66 v259.72,61.72
RAT1-POT-F  (1 unrouted)
  Bottom 0.203: 130.68,63.5 SV1.3
RAT2-POT  (via drill 0.35)
  Top 0.203: v265.81,65.79 268.73,65.79 R12.1
  Bottom 0.203: SV2.7 241.68,60.45 243.97,58.17 255.14,58.17 262.76,65.79 v265.81,65.79
RAT2-POT-F  (1 unrouted)
RATIO1  (via drill 0.35)
  Top 0.203: v229.24,48.26 234.31,48.26 v241.94,55.88 | v260.73,55.88 265.43,55.88 265.68,56.13 | v235.08,92.46 230,92.46 v229.49,91.95
  Top 0.254: C3.2 265.68,56.13 R7.2 266.32,55.24 U1.7
  Bottom 0.203: U$2.D22/A8 241.17,92.71 235.33,92.71 v235.08,92.46 | v229.24,48.26 218.57,58.93 218.57,83.57 226.95,91.95 v229.49,91.95 | v241.94,55.88 v260.73,55.88
RATIO2  (via drill 0.35)
  Top 0.203: R13.2 276.48,60.58 276.48,76.96 v273.69,79.76 | v271.4,79.76 270.64,79.76 269.62,80.77 256.16,80.77 v255.91,81.03
  Top 0.254: U1.1 273.94,54.48 C5.2 275.09,58.67 R13.2
  Bottom 0.203: v255.91,81.03 255.91,99.82 U$2.D19/A5 | v273.69,79.76 v271.4,79.76
RIGHT  (via drill 0.35)
  Top 0.254: v277.5,89.66 U5.12 | v283.59,89.92 283.66,89.85 R31.2 277.81,80.26 TP1.1 275.97,82.04 C17.2
  Bottom 0.254: v283.59,89.92 283.34,89.66 v277.5,89.66
RIGHT-OUT  (via drill 0.35)  (1 unrouted)
  Top 0.203: v255.14,32.51 275.72,32.51 278,34.8 278,61.72 280.29,64.01 v283.85,64.01 | v288.93,103.89 288.93,109.47 TP4.1
  Top 0.254: U5.14 276.23,93.16 v276.23,93.47
  Bottom 0.203: JP5.12 251.84,29.21 v255.14,32.51 | v283.85,64.01 295.02,75.18 295.02,100.84 289.43,100.84 288.93,101.35 v288.93,103.89
  Bottom 0.254: v276.23,93.47 276.23,101.85 GAINRIGHT.3 GAINRIGHT.2 284.61,110.24 TP4.1 284.61,114.81
RIGHT-OUT-F  (1 unrouted)
RST  (via drill 0.35)
  Top 0.203: v289.94,116.08 289.94,107.44 JP4.3
  Bottom 0.203: U$2.D7 259.97,114.05 275.46,114.05 278.26,116.84 289.18,116.84 v289.94,116.08
RST-F
  Bottom 0.203: JP3.3 185.29,107.19 185.55,107.44 185.55,113.79 183.01,116.33 122.05,116.33 121.54,115.82 U$3.RST
SCLK  (via drill 0.35)
  Top 0.254: U4.2 232.41,95.63 v233.93,97.16 | U$2.D21/A7 252.35,101.35 279.27,101.35 v280.03,100.58
  Bottom 0.203: v233.93,97.16 233.93,98.17 237.11,101.35 249.81,101.35 U$2.D21/A7
  Bottom 0.254: v280.03,100.58 284.35,104.9 JP4.4
SCLK-F
  Bottom 0.203: U$3.CLK 116.46,116.33 117.22,117.09 183.51,117.09 186.06,114.55 186.06,104.9 185.8,104.65 JP3.4
SDATA  (via drill 0.35)
  Top 0.203: v249.81,98.55 v245.49,98.55
  Top 0.254: U4.1 233.68,95.38 v235.33,97.03
  Bottom 0.203: v235.33,97.03 236.85,98.55 v245.49,98.55 | 254.38,98.81 254.13,98.55 v249.81,98.55
  Bottom 0.254: 254.38,98.81 254.89,99.31 254.89,114.05 U$2.D6 256.16,116.84 257.18,117.86 292.99,117.86 294.77,116.08 294.77,102.36 JP4.5
SDATA-F
  Bottom 0.203: U$3.DATA 113.92,116.59 115.19,117.86 183.77,117.86 186.59,115.04 186.59,102.64 186.06,102.11 JP3.5
SWITCH  (via drill 0.35)
  Top 0.203: U$2.D4 254.63,111.76 v256.67,111.76
  Bottom 0.203: v256.67,111.76 275.72,111.76 280.03,116.08 287.4,116.08 290.19,113.28 290.19,110.24 290.45,109.98 JP4.2
SWITCH-F
  Top 0.203: JP3.2 185.29,109.73 186.31,108.71 186.31,93.98 185.55,93.22 182.25,93.22 180.19,91.16 166.24,91.16 S1.2 S1.1

## Text on the board
bPlace: FJÖL V1.1
tNames: U4
bNames: Eat the rich | stereo out | THIS SYNTH / KILLS FASCISTS | - | + | RED HERE | peepee / poopoo